# Altium PCB NES Emulator PCB.PcbDoc (part 2 of 3)
Units mm, origin at the board's own origin, x right, y up, seen from the top; angles counter-clockwise.
Board outline 76 x 100 mm, 4 copper layers (Top Layer, GND Plane, Power Layer, Bottom Layer), stack 0.603 mm thick; 101 components, 158 nets, 536 pads, 230 vias.
Unrouted connection lines stored in the file: 6.
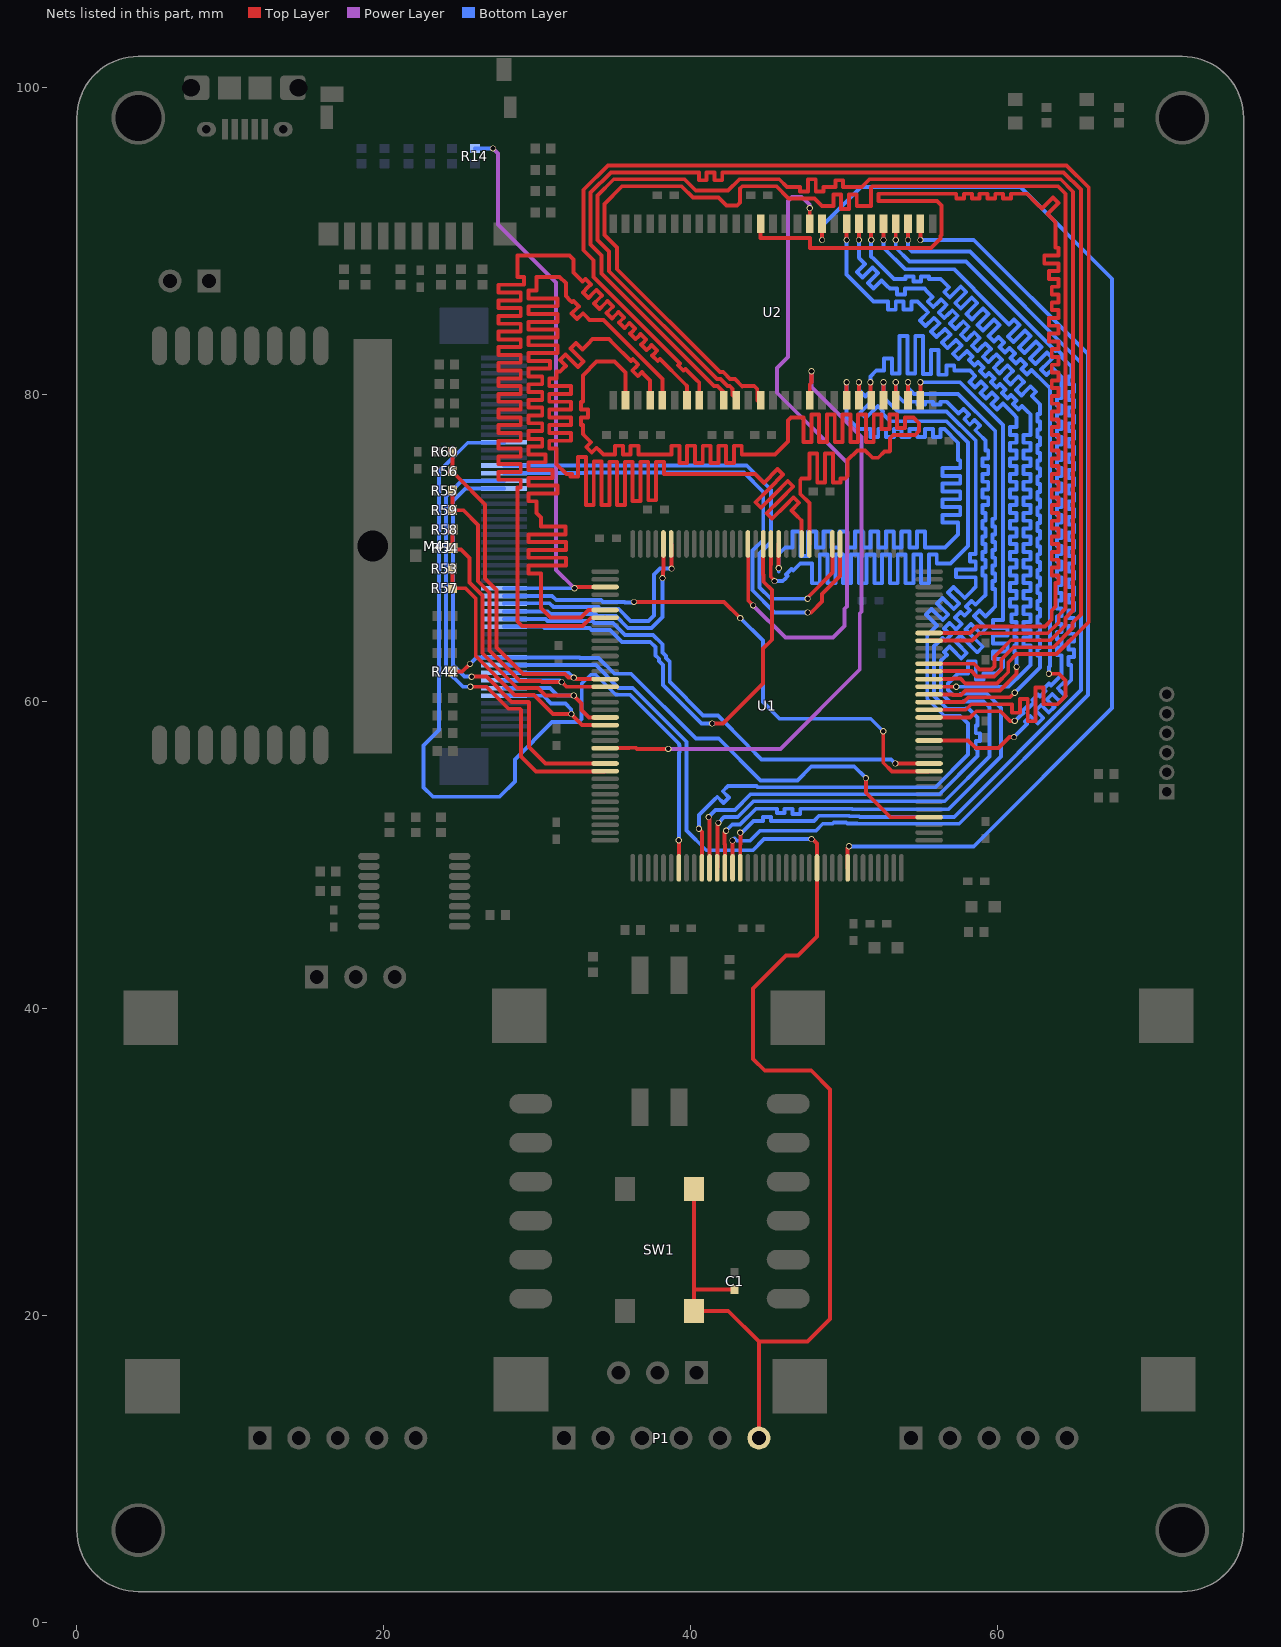
[diagram p4: the nets of this part, all layers, seen from the top]

## Via types
v1: diameter 0.4, hole 0.3, Top Layer to Bottom Layer, 225 vias
v2: diameter 0.65, hole 0.5, Top Layer to Bottom Layer, 2 vias
v3: diameter 0.6, hole 0.4, Top Layer to Bottom Layer, 2 vias
v4: diameter 0.45, hole 0.3, Top Layer to Bottom Layer, 1 vias

## Nets (pads, with @x,y where several pads share a name; then routed paths per layer and width w, separated by ;. In a path a pad name is that pad's centre, name@x,y a point inside that pad or via, vN(x,y) a via of type N, cw(c..) or ccw(c..) an arc to the next point about the centre after c; other vN are vias at no path point) (continued)
LCD_IM0: M41.6 R53.2 R57.1 U1.129 | length 22.2
  Top Layer w0.254: R53.2@24.476,68.627 R57.1@24.476,67.357 25.307,67.357 25.98,66.685 25.98,62.931 28.499,60.412 29.776,60.412 31.026,59.162 v1(32.214,59.162) 32.214,59.127 32.901,58.44 U1.129@34.41,58.44
  Bottom Layer w0.254: M41.6@27.818,60.354 30.386,60.354 30.886,59.854 31.816,59.854 32.204,59.466 32.204,59.171 v1(32.214,59.162)
LCD_IM1: M41.7 R54.2 R58.1 U1.128 | length 23.9
  Top Layer w0.254: R58.1@24.476,71.167 24.476,69.897 24.483,69.891 25.008,69.891 25.582,69.318 25.582,67.725 26.434,66.873 26.434,63.119 28.687,60.866 30.028,60.866 30.521,60.372 v1(32.361,60.372) 32.876,59.857 32.876,59.429 33.365,58.94 U1.128@34.41,58.94
  Bottom Layer w0.254: M41.7@27.818,60.854 30.816,60.854 31.298,60.372 v1(32.361,60.372)
LCD_IM2: M41.8 R55.2 R59.1 U1.124 | length 24.1
  Top Layer w0.254: R55.2@24.476,73.707 R59.1@24.476,72.437 25.18,72.437 26.138,71.479 26.138,67.811 26.888,67.061 26.888,63.307 28.875,61.32 30.216,61.32 30.289,61.247 v1(31.577,61.247) 31.884,60.94 U1.124@34.41,60.94
  Bottom Layer w0.254: M41.8@27.818,61.354 31.43,61.354 31.537,61.247 v1(31.577,61.247)
LCD_IM3: M41.9 R56.2 R60.1 U1.123 | length 26.4
  Top Layer w0.254: R60.1@24.476,76.247 24.476,74.952 24.779,74.65 24.779,74.628 26.592,72.815 26.592,67.999 27.342,67.249 27.342,63.496 29.063,61.774 31.795,61.774 32.034,61.535 v1(32.361,61.535) ; v1@32.496,61.44 U1.123@34.41,61.44
  Bottom Layer w0.254: M41.9@27.818,61.854 32.042,61.854 v1(32.361,61.535)
LCD_R2: M41.20 R14.1 U1.111 | length 38.7
  Top Layer w0.254: v1(32.417,67.357) 32.499,67.44 U1.111@34.41,67.44
  Power Layer w0.254: v1(27.107,96.004) 27.442,95.669 27.442,91.059 31.218,87.283 31.218,68.556 v1(32.417,67.357)
  Bottom Layer w0.254: R14.1@25.918,96.004 v1(27.107,96.004) ; M41.20@27.818,67.354 27.821,67.357 v1(32.417,67.357)
LCD_R3: M41.19 U1.46 | length 36
  Top Layer w0.254: v1(36.29,66.465) 42.157,66.465 v1(43.212,65.41) ; v1(52.524,58.039) 52.524,55.986 53.098,55.413 53.534,55.413 53.538,55.417 55.487,55.417 U1.46@55.51,55.44
  Bottom Layer w0.254: M41.19@27.818,66.854 30.947,66.854 31.223,66.578 34.157,66.578 34.282,66.453 35.673,66.453 35.686,66.44 36.299,66.44 36.29,66.449 v1(36.29,66.465) ; v1(43.212,65.41) 44.68,63.942 44.68,59.947 45.772,58.854 51.709,58.854 v1(52.524,58.039)
LCD_R4: M41.18 U1.103 | length 16
  Top Layer w0.254: U1.103@38.71,70.24 38.733,70.217 38.733,68.637 v1(38.737,68.633)
  Bottom Layer w0.254: M41.18@27.818,66.354 27.841,66.377 30.782,66.377 31.035,66.124 33.969,66.124 34.094,65.999 35.297,65.999 36.072,65.225 37.244,65.225 37.587,65.568 37.587,68.246 37.974,68.633 v1(38.737,68.633)
LCD_R5: M41.17 U1.104 | length 15.8
  Top Layer w0.254: v1@38.21,68.028 38.183,68.055 38.183,68.492 38.21,68.519 U1.104@38.21,70.24
  Bottom Layer w0.254: M41.17@27.818,65.854 30.663,65.854 30.847,65.67 33.781,65.67 33.906,65.546 35.109,65.546 35.884,64.771 37.432,64.771 37.919,65.257 37.925,65.257 38.145,65.477 v1(38.145,68.014)
LCD_R6: M41.16 U1.47 | length 32.8
  Top Layer w0.254: v1(53.316,55.94) U1.47@55.51,55.94
  Bottom Layer w0.254: M41.16@27.818,65.354 30.521,65.354 30.659,65.216 33.593,65.216 33.718,65.092 34.921,65.092 35.696,64.317 37.534,64.317 38.145,63.707 38.145,63.172 38.368,62.949 38.368,62.805 38.622,62.551 38.622,61.247 40.795,59.074 41.75,59.074 43.699,57.125 43.699,57.094 44.586,56.207 53.049,56.207 v1(53.316,55.94)
LCD_R7: M41.15 U1.91 | length 31.3
  Top Layer w0.254: v1(41.378,58.547) 42.101,58.547 44.706,61.152 44.706,63.423 45.285,64.002 45.285,67.23 44.735,67.78 44.735,68.231 44.706,68.26 44.706,70.236 U1.91@44.71,70.24
  Bottom Layer w0.254: M41.15@27.818,64.854 30.379,64.854 30.471,64.762 33.405,64.762 33.53,64.638 34.733,64.638 35.508,63.863 37.346,63.863 37.691,63.518 37.691,62.984 37.914,62.76 37.914,62.617 38.168,62.363 38.168,61.059 40.68,58.547 v1(41.378,58.547)
LCD_RDX: M41.35 U1.81 | length 33.8
  Top Layer w0.254: v1(47.601,65.779) 47.836,65.779 48.541,66.484 48.541,66.98 49.71,68.149 U1.81@49.71,70.24
  Bottom Layer w0.254: M41.35@27.818,74.854 33.202,74.854 33.242,74.894 43.452,74.894 44.711,73.636 44.711,70.511 44.007,69.808 44.007,67.224 45.452,65.779 v1(47.601,65.779)
LCD_RST: C1.2 M41.10 P1.6 SW1.1 SW1.2 U1.25 | length 93.4
  Top Layer w0.254: SW1.1@40.199,28.232 40.199,21.717 ; C1.2@42.837,21.675 40.241,21.675 40.199,21.717 ; P1.6@44.426,12 44.426,18.288 ; v1(47.855,51.012) 47.923,51.012 48.21,50.725 U1.25@48.21,49.14 48.21,44.678 46.966,43.434 46.204,43.434 44.045,41.275 44.045,36.703 44.807,35.941 47.837,35.941 49.066,34.712 49.066,19.753 47.601,18.288 44.426,18.288 ; 40.199,21.717 SW1.2@40.199,20.282 42.432,20.282 44.426,18.288
  Bottom Layer w0.254: M41.10@27.818,62.354 33.806,62.354 35.29,60.87 36.207,60.87 39.718,57.359 39.718,51.571 40.997,50.292 44.045,50.292 44.765,51.012 v1(47.855,51.012)
LCD_SDI: M41.34 U1.135 | length 30.4
  Top Layer w0.254: v1(25.63,60.94) 26.687,60.94 28.123,59.504 28.864,59.504 28.932,59.436 28.932,56.388 29.903,55.417 34.387,55.417 U1.135@34.41,55.44
  Bottom Layer w0.254: v1(25.63,60.94) 25.139,60.94 24.043,62.037 24.043,73.343 25.054,74.354 M41.34@27.818,74.354
LCD_SDO: M41.33 U1.134 | length 28.6
  Top Layer w0.254: v1(25.715,61.595) 26.674,61.595 28.311,59.958 29.408,59.958 29.44,59.926 29.44,57.012 30.512,55.94 U1.134@34.41,55.94
  Bottom Layer w0.254: v1(25.715,61.595) 25.249,61.595 24.497,62.347 24.497,73.035 25.316,73.854 M41.33@27.818,73.854
LCD_TE: M41.39 U1.7 | length 58.4
  Top Layer w0.254: U1.7@39.21,49.14 v1(39.21,50.945)
  Bottom Layer w0.254: M41.39@27.818,76.854 27.795,76.831 25.464,76.831 23.589,74.956 23.589,58.133 22.576,57.12 22.576,54.386 23.188,53.774 27.534,53.774 28.529,54.769 28.529,56.204 30.96,58.635 32.681,58.635 32.869,58.823 32.869,60.116 32.888,60.135 32.888,61.139 33.471,61.722 33.796,61.722 35.102,60.416 36.019,60.416 39.21,57.225 39.21,57.168 39.264,57.114 39.264,56.678 39.21,56.624 v1(39.21,50.945)
LCD_VSYNC: M41.11 R44.2 U1.40 | length 37
  Top Layer w0.254: R44.2@24.479,61.924 25.106,61.924 v1(25.611,62.429) ; v1(51.399,54.991) 51.399,54.035 52.994,52.44 U1.40@55.51,52.44
  Bottom Layer w0.254: v1(25.611,62.429) 26.036,62.854 M41.11@27.818,62.854 32.745,62.854 32.777,62.822 33.981,62.822 35.013,61.789 36.104,61.789 40.336,57.557 41.808,57.557 44.521,54.845 46.928,54.845 47.836,55.753 50.637,55.753 v1(51.399,54.991)
LCD_WRX: M41.36 U1.82 | length 32.4
  Top Layer w0.254: v1(47.601,66.675) 47.601,66.74 49.233,68.372 49.233,70.217 U1.82@49.21,70.24
  Bottom Layer w0.254: M41.36@27.818,75.354 43.634,75.354 45.219,73.769 45.219,70.377 44.461,69.619 44.461,67.412 45.198,66.675 v1(47.601,66.675)
MEM_A0: U1.10 U2.23 | length 66.2
  Top Layer w0.254: v1(40.515,51.689) 40.71,51.494 U1.10@40.71,49.14 ; U2.23@52.541,79.594 v1(52.541,80.772)
  Bottom Layer w0.254: v1(40.515,51.689) 40.515,52.578 41.531,53.594 41.71,53.774 42.125,53.359 42.484,53.718 42.069,54.133 42.404,54.467 42.658,54.467 42.801,54.467 44.257,54.467 44.333,54.391 55.917,54.391 58.041,56.515 58.041,58.547 57.537,59.051 56.496,59.051 55.39,60.158 55.39,64.278 55.501,64.389 55.68,64.569 56.039,64.928 55.314,65.653 55.673,66.013 56.399,65.287 56.758,65.646 56.032,66.372 56.392,66.731 57.117,66.005 57.476,66.365 56.751,67.09 57.11,67.449 57.835,66.724 58.195,67.083 58.546,67.434 58.549,67.437 58.549,67.818 58.549,68.072 57.269,68.072 57.269,68.58 58.549,68.58 58.549,69.088 58.175,69.088 58.175,69.596 58.549,69.596 58.549,70.104 58.549,70.612 58.549,70.739 58.549,76.976 56.658,78.867 53.469,78.867 52.541,79.795 v1(52.541,80.772)
MEM_A1: U1.11 U2.24 | length 66.2
  Top Layer w0.254: v1(41.15,52.451) 41.21,52.391 U1.11@41.21,49.14 ; U2.24@53.341,79.594 v1(53.341,80.772)
  Bottom Layer w0.254: v1(41.15,52.451) 41.604,52.905 42.859,52.905 43.891,53.937 56.177,53.937 58.676,56.436 58.676,56.642 58.676,56.896 58.549,56.896 58.549,57.404 58.676,57.404 58.817,57.404 58.817,57.912 58.676,57.912 58.549,57.912 58.549,58.42 58.676,58.42 58.676,58.928 58.074,59.53 57.898,59.53 57.873,59.505 56.684,59.505 55.844,60.346 55.844,63.589 56.023,63.769 56.382,64.128 56.569,63.941 56.929,64.3 56.742,64.487 56.491,64.738 56.85,65.097 57.101,64.846 57.271,64.676 57.63,65.036 57.46,65.205 57.21,65.456 57.569,65.815 57.819,65.565 58.178,65.924 57.928,66.174 58.287,66.534 58.538,66.283 58.897,66.642 59.184,66.929 59.184,67.183 59.184,67.691 59.184,68.199 59.003,68.199 59.003,68.707 59.184,68.707 59.184,69.215 59.003,69.215 59.003,69.723 59.184,69.723 59.184,70.231 59.003,70.231 59.003,70.739 59.184,70.739 59.184,71.247 59.003,71.247 59.003,71.755 59.184,71.755 59.184,72.263 59.003,72.263 59.003,72.771 59.184,72.771 59.365,72.771 59.365,73.279 59.184,73.279 59.003,73.279 59.003,73.787 59.184,73.787 59.365,73.787 59.365,74.295 59.184,74.295 59.003,74.295 59.003,74.803 59.184,74.803 59.365,74.803 59.365,75.311 59.184,75.311 59.003,75.311 59.003,75.819 59.184,75.819 59.365,75.819 59.365,76.327 59.184,76.327 59.184,76.835 59.184,76.983 59.057,77.11 58.877,77.29 58.518,77.649 58.821,77.952 58.462,78.312 58.159,78.008 57.799,78.367 58.103,78.671 57.744,79.03 57.44,78.727 57.081,79.086 56.722,79.445 56.665,79.502 56.517,79.502 56.263,79.502 56.263,79.321 55.755,79.321 55.755,79.502 55.247,79.502 55.247,79.321 54.739,79.321 54.739,79.502 54.231,79.502 53.85,79.502 ; v1(53.341,80.772) 53.341,80.01 53.849,79.502
MEM_A2: U1.12 U2.25 | length 66
  Top Layer w0.254: U1.12@41.71,49.14 41.733,49.163 41.733,50.517 41.729,50.521 41.729,52.014 v1(41.785,52.07) ; U2.25@54.141,79.594 v1(54.141,80.772)
  Bottom Layer w0.254: v1(41.785,52.07) 42.166,52.451 43.047,52.451 44.079,53.483 56.533,53.483 59.438,56.388 59.438,59.603 59.057,59.984 57.71,59.984 57.685,59.959 56.872,59.959 56.298,60.534 56.298,62.643 56.487,62.832 56.666,63.011 56.474,63.204 56.833,63.563 57.026,63.371 57.605,62.791 57.964,63.15 57.385,63.73 57.193,63.922 57.552,64.281 57.744,64.089 58.649,63.184 59.008,63.543 58.103,64.448 57.894,64.657 58.253,65.017 58.462,64.807 58.875,64.395 59.234,64.754 58.822,65.167 58.442,65.546 58.802,65.905 59.181,65.526 59.54,65.885 59.819,66.164 59.819,66.167 59.819,67.056 59.819,67.31 59.638,67.31 59.638,67.818 59.819,67.818 59.819,68.326 59.638,68.326 59.638,68.834 59.819,68.834 59.819,69.342 59.638,69.342 59.638,69.85 59.819,69.85 59.819,70.358 59.638,70.358 59.638,70.866 59.819,70.866 59.819,71.374 59.638,71.374 59.638,71.882 59.819,71.882 59.819,73.914 59.819,77.597 57.406,80.01 54.522,80.01 54.141,80.391 v1(54.141,80.772)
MEM_A3: U1.13 U2.26 | length 66.2
  Top Layer w0.254: U1.13@42.21,49.14 42.21,50.682 42.183,50.709 42.183,51.452 v1(42.293,51.562) ; U2.26@54.941,79.594 v1(54.941,80.772)
  Bottom Layer w0.254: v1(42.293,51.562) 42.693,51.962 43.2,51.962 44.232,52.994 44.833,52.994 45.087,52.994 45.595,52.994 45.595,52.706 46.103,52.706 46.103,52.994 46.611,52.994 46.611,52.651 47.119,52.651 47.119,52.994 47.627,52.994 48.008,52.994 50.492,52.994 50.527,52.959 56.771,52.959 60.2,56.388 60.2,59.563 59.277,60.486 57.57,60.486 57.497,60.413 57.06,60.413 56.752,60.722 56.752,61.158 57.406,61.812 57.787,61.812 58.041,61.812 58.041,62.584 58.549,62.584 58.549,61.812 58.549,61.394 59.057,61.394 59.057,61.812 59.565,61.812 59.819,61.812 59.909,61.812 60.327,62.23 60.327,62.484 60.327,62.738 59.688,62.738 59.688,63.246 60.327,63.246 60.629,63.246 60.629,63.754 60.327,63.754 59.688,63.754 59.688,64.262 60.327,64.262 60.629,64.262 60.629,64.77 60.327,64.77 59.688,64.77 59.688,65.278 60.327,65.278 60.327,66.294 60.327,77.978 57.533,80.772 v1(54.941,80.772)
MEM_A4: U1.14 U2.29 | length 66.3
  Top Layer w0.254: U1.14@42.687,49.163 U1.14@42.71,49.14 v1(42.71,50.927) ; v1(54.941,90.043) U2.29@54.941,91.094
  Bottom Layer w0.254: v1(42.71,50.927) 42.842,51.059 42.993,50.908 43.855,50.908 44.509,51.562 48.135,51.562 48.586,52.013 49.23,52.013 49.303,52.086 50.116,52.086 50.178,52.024 50.804,52.024 50.815,52.013 57.476,52.013 65.861,60.398 65.861,82.604 58.422,90.043 v1(54.941,90.043)
MEM_A5: U1.15 U2.30 | length 66.2
  Top Layer w0.254: U1.15@43.21,49.14 43.212,49.142 43.212,50.684 43.237,50.709 43.237,51.41 v1(43.212,51.435) ; v1(54.141,90.043) U2.30@54.141,91.094
  Bottom Layer w0.254: v1(43.212,51.435) 43.315,51.435 44.077,52.197 44.452,52.197 44.706,52.197 44.706,52.459 45.214,52.459 45.214,52.197 46.357,52.197 48.008,52.197 48.351,52.54 50.304,52.54 50.339,52.505 50.965,52.505 51.003,52.467 57.148,52.467 65.407,60.726 65.407,82.042 58.168,89.281 54.395,89.281 54.141,89.535 v1(54.141,90.043)
MEM_A6: U1.50 U2.31 | length 66.2
  Top Layer w0.254: v1(53.341,90.043) U2.31@53.341,91.094 ; U1.50@55.51,57.44 58.049,57.44 58.549,56.94 60.032,56.94 60.75,57.658 v1(61.041,57.658)
  Bottom Layer w0.254: v1(53.341,90.043) 53.341,89.536 54.231,88.646 57.914,88.646 62.422,84.138 63.747,82.813 63.836,82.903 64.196,82.544 64.106,82.454 64.465,82.095 64.645,81.915 64.772,81.788 64.772,81.407 64.772,81.153 64.591,81.153 64.591,80.645 64.772,80.645 64.953,80.645 64.953,80.137 64.772,80.137 64.591,80.137 64.591,79.629 64.772,79.629 64.953,79.629 64.953,79.121 64.772,79.121 64.591,79.121 64.591,78.613 64.772,78.613 64.953,78.613 64.953,78.105 64.772,78.105 64.591,78.105 64.591,77.597 64.772,77.597 64.953,77.597 64.953,77.089 64.772,77.089 64.591,77.089 64.591,76.581 64.772,76.581 64.953,76.581 64.953,76.073 64.772,76.073 64.591,76.073 64.591,75.565 64.772,75.565 64.953,75.565 64.953,75.057 64.772,75.057 64.591,75.057 64.591,74.549 64.772,74.549 64.953,74.549 64.953,74.041 64.772,74.041 64.591,74.041 64.591,73.533 64.772,73.533 64.953,73.533 64.953,73.025 64.772,73.025 64.591,73.025 64.591,72.517 64.772,72.517 64.953,72.517 64.953,72.009 64.772,72.009 64.591,72.009 64.591,71.501 64.772,71.501 64.953,71.501 64.953,70.993 64.772,70.993 64.591,70.993 64.591,70.485 64.772,70.485 64.953,70.485 64.953,69.977 64.772,69.977 64.591,69.977 64.591,69.469 64.772,69.469 64.953,69.469 64.953,68.961 64.772,68.961 64.591,68.961 64.591,68.453 64.772,68.453 64.953,68.453 64.953,67.945 64.772,67.945 64.591,67.945 64.591,67.437 64.772,67.437 64.953,67.437 64.953,66.929 64.772,66.929 64.591,66.929 64.591,66.421 64.772,66.421 64.953,66.421 64.953,65.913 64.772,65.913 64.591,65.913 64.591,65.405 64.772,65.405 64.953,65.405 64.953,64.897 64.772,64.897 64.591,64.897 64.591,64.389 64.772,64.389 64.953,64.389 64.953,63.881 64.772,63.881 64.591,63.881 64.591,63.373 64.772,63.373 64.953,63.373 64.953,62.865 64.772,62.865 64.591,62.865 64.591,62.357 64.772,62.357 64.772,62.103 64.772,61.468 64.772,61.389 64.418,61.035 64.255,61.198 63.895,60.839 64.058,60.676 64.386,60.348 64.027,59.989 63.699,60.317 63.536,60.48 63.177,60.12 63.34,59.957 63.668,59.629 63.309,59.27 62.981,59.598 62.818,59.761 62.459,59.402 62.622,59.239 62.95,58.911 62.59,58.552 62.262,58.88 62.099,59.043 61.74,58.684 61.903,58.521 61.724,58.341 v1(61.041,57.658)
MEM_A7: U1.53 U2.32 | length 66.2
  Top Layer w0.254: v1(52.541,90.043) U2.32@52.541,91.094 ; U1.53@55.51,58.94 58.18,58.94 58.583,59.343 60.166,59.343 60.793,58.716 v1(61.089,58.716)
  Bottom Layer w0.254: v1(52.541,90.043) 52.541,89.535 53.938,88.138 57.132,88.138 59.745,85.525 60.724,84.545 61.047,84.868 61.406,84.509 61.083,84.186 60.654,83.757 61.013,83.398 61.443,83.827 61.765,84.15 62.124,83.79 61.802,83.468 61.372,83.038 61.731,82.679 62.161,83.109 62.483,83.431 62.843,83.072 62.52,82.749 62.091,82.32 62.45,81.961 62.879,82.39 63.202,82.713 63.561,82.354 63.239,82.031 62.809,81.602 63.168,81.242 63.598,81.672 63.957,81.313 64.137,81.133 64.137,80.772 64.137,80.264 64.137,79.756 63.831,79.756 63.831,79.248 64.137,79.248 64.137,78.74 63.831,78.74 63.831,78.232 64.137,78.232 64.137,77.724 63.831,77.724 63.831,77.216 64.137,77.216 64.137,76.708 63.831,76.708 63.831,76.2 64.137,76.2 64.137,75.692 63.831,75.692 63.831,75.184 64.137,75.184 64.137,74.676 63.831,74.676 63.831,74.168 64.137,74.168 64.137,73.66 63.831,73.66 63.831,73.152 64.137,73.152 64.137,72.644 63.831,72.644 63.831,72.136 64.137,72.136 64.137,71.628 63.831,71.628 63.831,71.12 64.137,71.12 64.137,70.612 63.831,70.612 63.831,70.104 64.137,70.104 64.137,69.596 63.831,69.596 63.831,69.088 64.137,69.088 64.137,68.58 63.831,68.58 63.831,68.072 64.137,68.072 64.137,67.564 63.831,67.564 63.831,67.056 64.137,67.056 64.137,66.548 63.831,66.548 63.831,66.04 64.137,66.04 64.137,65.532 63.831,65.532 63.831,65.024 64.137,65.024 64.137,64.516 63.831,64.516 63.831,64.008 64.137,64.008 64.137,63.5 63.831,63.5 63.831,62.992 64.137,62.992 64.137,62.484 64.137,61.976 64.137,61.722 63.804,61.39 63.445,61.031 63.323,61.153 62.964,60.793 63.086,60.671 62.727,60.312 62.605,60.434 62.246,60.075 62.368,59.953 62.008,59.594 61.919,59.684 61.559,59.324 61.649,59.235 61.47,59.055 61.179,58.764 61.163,58.764 61.115,58.716 v1(61.089,58.716)
MEM_A8: U1.54 U2.33 | length 66.2
  Top Layer w0.254: v1(51.741,90.043) U2.33@51.741,91.094 ; U1.54@55.51,59.44 57.9,59.44 58.259,59.799 60.162,59.799 60.416,59.799 60.924,59.799 60.924,59.243 61.432,59.243 61.432,59.799 61.432,60.152 61.94,60.152 61.94,59.799 61.94,58.695 62.448,58.695 62.448,59.799 62.448,60.903 62.956,60.903 62.956,59.799 63.464,59.799 63.884,59.799 64.41,60.325 64.41,61.351 63.972,61.789 v1(63.315,61.789)
  Bottom Layer w0.254: v1(51.741,90.043) 51.741,88.977 51.92,88.797 52.279,88.438 52.639,88.079 52.998,87.72 53.215,87.503 53.469,87.503 53.977,87.503 53.977,87.659 54.485,87.659 54.485,87.503 54.485,87.347 54.993,87.347 54.993,87.503 54.993,87.659 55.501,87.659 55.501,87.503 56.009,87.503 56.263,87.503 56.442,87.323 56.801,86.964 56.499,86.662 56.858,86.303 57.161,86.605 57.574,87.018 57.933,86.659 57.52,86.246 57.217,85.943 57.577,85.584 57.879,85.887 58.292,86.3 58.651,85.94 58.238,85.527 57.936,85.225 58.295,84.866 58.597,85.168 59.011,85.581 59.37,85.222 58.957,84.809 58.654,84.506 59.013,84.147 59.316,84.45 59.729,84.863 60.088,84.504 59.675,84.091 59.373,83.788 59.732,83.429 60.034,83.731 60.394,83.372 60.091,83.07 60.45,82.71 60.753,83.013 61.112,82.654 60.81,82.351 61.169,81.992 61.471,82.294 61.83,81.935 61.528,81.633 61.887,81.274 62.19,81.576 63.121,80.645 63.375,80.391 63.375,62.299 63.315,62.239 v1(63.315,61.789)
MEM_A9: U1.55 U2.34 | length 66.2
  Top Layer w0.254: v1(50.941,90.043) U2.34@50.941,91.094 ; U1.55@55.51,59.94 57.758,59.94 58.071,60.253 60.79,60.253 v1(61.089,60.552)
  Bottom Layer w0.254: v1(50.941,90.043) 50.941,88.888 50.985,88.844 51.344,88.484 50.806,87.946 51.165,87.587 51.703,88.125 51.819,88.241 52.178,87.882 52.063,87.766 51.525,87.228 51.884,86.869 52.422,87.407 52.781,87.048 52.961,86.868 53.427,86.868 53.427,86.494 53.935,86.494 53.935,86.868 54.443,86.868 54.951,86.868 55.205,86.868 55.376,86.697 55.735,86.338 55.424,86.026 55.783,85.667 56.094,85.978 56.299,86.184 56.659,85.824 56.453,85.619 56.142,85.308 56.501,84.949 56.813,85.26 57.018,85.465 57.377,85.106 57.172,84.901 56.861,84.59 57.22,84.23 57.531,84.542 57.736,84.747 58.095,84.387 57.89,84.182 57.579,83.871 57.938,83.512 58.249,83.823 58.455,84.028 58.814,83.669 58.609,83.464 58.298,83.153 58.657,82.793 58.968,83.105 59.173,83.31 59.532,82.951 59.327,82.745 59.016,82.434 59.375,82.075 59.686,82.386 59.891,82.591 60.251,82.232 60.046,82.027 59.734,81.716 60.094,81.357 60.405,81.668 60.61,81.873 60.969,81.514 60.764,81.309 60.453,80.997 60.812,80.638 61.123,80.949 61.328,81.155 61.688,80.795 61.482,80.59 61.171,80.279 61.53,79.92 61.842,80.231 62.126,80.516 62.486,80.156 62.201,79.872 62.56,79.513 62.74,79.333 62.74,79.221 62.74,78.713 62.57,78.713 62.57,78.205 62.74,78.205 62.74,77.697 62.57,77.697 62.57,77.189 62.74,77.189 62.74,76.681 62.57,76.681 62.57,76.173 62.74,76.173 62.74,75.665 62.57,75.665 62.57,75.157 62.74,75.157 62.74,74.649 62.57,74.649 62.57,74.141 62.74,74.141 62.74,73.633 62.57,73.633 62.57,73.125 62.74,73.125 62.74,72.617 62.57,72.617 62.57,72.109 62.74,72.109 62.74,71.601 62.57,71.601 62.57,71.093 62.74,71.093 62.74,70.585 62.57,70.585 62.57,70.077 62.74,70.077 62.74,69.569 62.57,69.569 62.57,69.061 62.74,69.061 62.74,68.553 62.57,68.553 62.57,68.045 62.74,68.045 62.74,67.537 62.57,67.537 62.57,67.029 62.74,67.029 62.74,66.521 62.57,66.521 62.57,66.013 62.74,66.013 62.74,65.505 62.57,65.505 62.57,64.997 62.74,64.997 62.74,64.489 62.57,64.489 62.57,63.981 62.74,63.981 62.74,63.473 62.57,63.473 62.57,62.965 62.74,62.965 62.74,62.457 62.74,62.203 62.6,62.063 62.241,61.704 61.881,61.345 61.522,60.986 61.343,60.806 v1(61.089,60.552)
MEM_A10: U1.56 U2.22 | length 66.2
  Top Layer w0.254: v1(51.691,80.772) 51.691,79.644 U2.22@51.741,79.594 ; U1.56@55.51,60.44 57.033,60.44 57.06,60.413 57.589,60.413 57.883,60.707 60.133,60.707 61.216,61.789 v1(61.216,62.23)
  Bottom Layer w0.254: v1(51.691,80.772) 51.691,81.153 52.072,81.534 52.326,81.534 52.58,81.534 52.58,82.333 53.088,82.333 53.088,81.534 53.088,81.334 53.596,81.334 53.596,81.534 53.596,83.795 54.104,83.795 54.104,81.534 54.104,81.334 54.612,81.334 54.612,81.534 54.612,83.795 55.12,83.795 55.12,81.534 55.12,81.303 55.628,81.303 55.628,81.534 55.628,82.888 56.136,82.888 56.136,81.534 56.136,81.261 56.644,81.261 56.644,81.534 56.644,81.877 57.152,81.877 57.152,81.534 57.406,81.534 57.66,81.534 57.914,81.534 58.168,81.534 58.522,81.18 58.144,80.803 58.503,80.443 58.881,80.821 59.24,80.462 58.862,80.084 59.222,79.725 59.599,80.102 59.958,79.743 59.581,79.366 59.94,79.007 60.318,79.384 60.677,79.025 61.036,78.666 61.216,78.486 61.216,78.359 61.216,77.851 60.781,77.851 60.781,77.343 61.216,77.343 61.216,76.835 60.781,76.835 60.781,76.327 61.216,76.327 61.216,75.819 60.781,75.819 60.781,75.311 61.216,75.311 61.216,74.803 60.781,74.803 60.781,74.295 61.216,74.295 61.216,73.787 60.781,73.787 60.781,73.279 61.216,73.279 61.216,72.771 60.781,72.771 60.781,72.263 61.216,72.263 61.216,71.755 60.781,71.755 60.781,71.247 61.216,71.247 61.216,70.739 60.781,70.739 60.781,70.231 61.216,70.231 61.216,69.723 60.781,69.723 60.781,69.215 61.216,69.215 61.216,68.707 60.781,68.707 60.781,68.199 61.216,68.199 61.216,67.691 60.781,67.691 60.781,67.183 61.216,67.183 61.216,66.675 60.781,66.675 60.781,66.167 61.216,66.167 61.216,65.659 60.876,65.659 60.876,65.151 61.216,65.151 61.216,64.643 61.083,64.643 61.083,64.135 61.216,64.135 61.216,63.627 61.083,63.627 61.083,63.119 61.216,63.119 61.216,62.865 v1(61.216,62.23)
MEM_A11: U1.57 U2.35 | length 66.2
  Top Layer w0.254: v1(50.141,90.043) U2.35@50.141,91.094 ; U1.57@55.51,60.94 v1(57.279,60.94)
  Bottom Layer w0.254: v1(50.141,90.043) 50.141,87.783 51.895,86.029 52.326,86.029 52.834,86.029 52.834,85.495 53.342,85.495 53.342,86.029 53.85,86.029 53.85,85.514 54.358,85.514 54.358,86.029 54.612,86.029 54.764,86.029 55.322,85.471 55.459,85.333 54.913,84.788 55.273,84.428 55.818,84.974 56.178,84.615 55.632,84.069 55.991,83.71 56.537,84.256 56.896,83.897 56.35,83.351 56.709,82.991 57.255,83.537 57.614,83.178 57.069,82.632 57.428,82.273 57.974,82.819 58.333,82.46 58.108,82.235 58.467,81.875 58.692,82.1 59.051,81.741 58.827,81.517 59.186,81.158 59.411,81.382 59.77,81.023 59.545,80.798 59.904,80.439 60.129,80.664 60.488,80.304 60.264,80.08 60.623,79.721 60.847,79.945 61.207,79.586 60.982,79.362 61.341,79.002 61.566,79.227 61.925,78.868 62.105,78.688 62.105,78.359 62.105,77.851 62.105,77.343 61.67,77.343 61.67,76.835 62.105,76.835 62.105,76.327 61.67,76.327 61.67,75.819 62.105,75.819 62.105,75.311 61.67,75.311 61.67,74.803 62.105,74.803 62.105,74.295 61.67,74.295 61.67,73.787 62.105,73.787 62.105,73.279 61.67,73.279 61.67,72.771 62.105,72.771 62.105,72.263 61.67,72.263 61.67,71.755 62.105,71.755 62.105,71.247 61.67,71.247 61.67,70.739 62.105,70.739 62.105,70.231 61.67,70.231 61.67,69.723 62.105,69.723 62.105,69.215 61.67,69.215 61.67,68.707 62.105,68.707 62.105,68.199 61.67,68.199 61.67,67.691 62.105,67.691 62.105,67.183 61.67,67.183 61.67,66.675 62.105,66.675 62.105,66.167 61.67,66.167 61.67,65.659 62.105,65.659 62.105,65.151 61.67,65.151 61.67,64.643 62.105,64.643 62.105,64.135 61.67,64.135 61.67,63.627 62.105,63.627 62.105,63.119 62.105,62.611 62.105,62.357 61.987,62.239 61.627,61.88 61.268,61.521 61.089,61.341 60.688,60.94 58.041,60.94 v1(57.279,60.94)
MEM_BA0: U1.89 U2.20 | length 67.3
  Top Layer w0.254: U1.89@45.71,70.24 45.71,68.683 v1(45.722,68.671) ; U2.20@50.141,79.594 v1(50.141,80.772)
  Bottom Layer w0.254: 45.716,68.453 45.716,69.59 ; v1(45.722,68.671) 45.722,69.584 45.716,69.59 ; v1(50.141,80.772) 50.141,78.512 50.929,77.724 51.31,77.724 51.691,77.724 51.691,77.206 52.199,77.206 52.199,77.724 52.707,77.724 52.707,77.206 53.215,77.206 53.215,77.724 53.723,77.724 53.723,77.206 54.231,77.206 54.231,77.724 54.739,77.724 54.739,77.206 55.247,77.206 55.247,77.724 55.755,77.724 55.755,77.206 56.263,77.206 56.263,77.724 56.517,77.724 57.406,76.835 57.406,75.692 57.543,75.692 57.543,75.184 57.406,75.184 56.378,75.184 56.378,74.676 57.406,74.676 57.543,74.676 57.543,74.168 57.406,74.168 56.378,74.168 56.378,73.66 57.406,73.66 57.543,73.66 57.543,73.152 57.406,73.152 56.378,73.152 56.378,72.644 57.406,72.644 57.543,72.644 57.543,72.136 57.406,72.136 56.378,72.136 56.378,71.628 57.406,71.628 57.406,71.12 57.406,70.866 56.558,70.018 56.261,70.018 55.753,70.018 55.245,70.018 55.245,71.045 54.737,71.045 54.737,70.018 54.229,70.018 54.229,71.045 53.721,71.045 53.721,70.018 53.213,70.018 53.213,71.045 52.705,71.045 52.705,70.018 52.197,70.018 52.197,71.045 51.689,71.045 51.689,70.018 51.181,70.018 51.181,71.045 50.673,71.045 50.673,70.018 50.165,70.018 50.165,71.045 49.657,71.045 49.657,70.018 49.149,70.018 49.149,71.045 48.641,71.045 48.641,70.018 48.133,70.018 48.133,71.045 47.625,71.045 47.625,70.018 47.625,69.459 47.117,69.459 47.117,70.018 47.117,71.045 46.609,71.045 46.609,70.018 46.355,70.018 46.144,70.018 45.716,69.59
MEM_BA1: U1.90 U2.21 | length 66.1
  Top Layer w0.254: U1.90@45.21,70.24 45.21,68.905 45.195,68.89 45.195,68.105 45.442,67.858 v1(45.442,67.818) ; U2.21@50.941,79.594 v1(50.941,80.772)
  Bottom Layer w0.254: v1(45.442,67.818) 45.926,67.818 45.951,67.843 45.976,67.818 46.123,67.966 46.303,68.145 46.201,68.247 46.56,68.606 46.662,68.504 47.021,68.864 47.119,68.961 47.373,68.961 47.881,68.961 47.881,67.681 48.389,67.681 48.389,68.961 48.389,69.564 48.897,69.564 48.897,68.961 48.897,67.681 49.405,67.681 49.405,68.961 49.405,69.564 49.913,69.564 49.913,68.961 49.913,67.681 50.421,67.681 50.421,68.961 50.421,69.564 50.929,69.564 50.929,68.961 50.929,67.681 51.437,67.681 51.437,68.961 51.437,69.564 51.945,69.564 51.945,68.961 51.945,67.681 52.453,67.681 52.453,68.961 52.453,69.564 52.961,69.564 52.961,68.961 52.961,67.681 53.469,67.681 53.469,68.961 53.469,69.564 53.977,69.564 53.977,68.961 53.977,67.681 54.485,67.681 54.485,68.961 54.485,69.564 54.993,69.564 54.993,68.961 54.993,67.681 55.501,67.681 55.501,68.961 55.501,69.564 56.009,69.564 56.009,68.961 56.517,68.961 56.898,68.961 57.077,69.141 57.436,69.5 57.469,69.532 58.041,70.104 58.041,76.842 56.651,78.232 52.973,78.232 52.794,78.412 52.435,78.771 52.524,78.861 52.165,79.22 52.075,79.13 51.387,78.441 51.027,78.8 51.716,79.489 51.87,79.643 51.511,80.003 51.357,79.848 50.998,80.207 50.929,80.277 50.929,80.76 v1(50.941,80.772)
MEM_CAS: U1.132 U2.17 | length 41.5
  Top Layer w0.254: U1.132@34.41,56.94 35.956,56.94 35.983,56.967 36.419,56.967 36.49,56.896 v1(38.518,56.896) ; U2.17@47.741,79.594 47.741,80.646 47.855,80.761 v1(47.855,81.488)
  Power Layer w0.254: v1(38.518,56.896) 45.823,56.896 50.992,62.065 50.992,62.312 50.995,62.315 50.995,64.525 50.992,64.528 50.992,65.717 51.118,65.842 51.118,77.213 47.855,80.476 v1(47.855,81.488)
MEM_CKE0: U1.29 U2.37 | length 74.7
  Top Layer w0.254: v1(48.541,90.043) U2.37@48.541,91.094 ; U1.29@50.21,49.14 50.21,50.424 50.292,50.506 v1(50.292,50.546)
  Bottom Layer w0.254: v1(48.541,90.043) 48.541,90.907 48.516,90.932 51.075,93.491 61.463,93.491 67.439,87.515 67.439,59.563 58.422,50.546 v1(50.292,50.546)
MEM_CLK: U1.93 U2.38 | length 44.2
  Top Layer w0.254: U1.93@43.71,70.24 43.733,70.217 43.733,66.551 v1(44.045,66.239) ; U2.38@47.741,91.094 v1(47.741,92.117)
  Power Layer w0.254: v1(44.045,66.239) 46.149,64.135 49.245,64.135 50.014,64.904 50.014,66.023 50.16,66.169 50.16,75.546 45.614,80.092 45.614,81.706 46.331,82.423 46.331,92.583 46.585,92.837 47.22,92.837 47.713,92.344 47.713,92.145 v1(47.741,92.117)
MEM_D0: U1.85 U2.2 | length 92.2
  Top Layer w0.254: U2.2@35.741,79.594 35.741,81.407 35.033,82.115 33.857,82.115 32.968,81.226 32.968,79.756 32.968,79.502 32.841,79.502 32.841,78.994 32.968,78.994 33.289,78.994 33.289,78.486 32.968,78.486 32.841,78.486 32.841,77.978 32.968,77.978 32.968,77.724 32.968,77.597 32.968,77.397 33.14,77.224 33.499,76.865 33.179,76.545 33.538,76.186 33.859,76.506 34.038,76.326 34.292,76.073 34.546,76.073 35.054,76.073 35.054,76.64 35.562,76.64 35.562,76.073 36.07,76.073 36.07,76.64 36.578,76.64 36.578,76.073 37.086,76.073 37.467,76.073 37.721,76.073 38.229,76.073 38.737,76.073 38.737,76.64 39.245,76.64 39.245,76.073 39.245,75.506 39.753,75.506 39.753,76.073 39.753,76.64 40.261,76.64 40.261,76.073 40.261,75.506 40.769,75.506 40.769,76.073 40.769,76.64 41.277,76.64 41.277,76.073 41.277,75.506 41.785,75.506 41.785,76.073 41.785,76.64 42.293,76.64 42.293,76.073 42.293,75.506 42.801,75.506 42.801,76.073 42.801,76.64 43.309,76.64 43.309,76.073 45.468,76.073 46.312,76.918 46.312,78.279 46.52,78.486 46.827,78.486 47.335,78.486 47.335,76.874 47.843,76.874 47.843,78.486 47.843,78.667 48.351,78.667 48.351,78.486 48.351,76.874 48.859,76.874 48.859,78.486 48.859,78.667 49.367,78.667 49.367,78.486 49.367,76.874 49.875,76.874 49.875,78.486 49.875,78.667 50.383,78.667 50.383,78.486 50.383,76.874 50.891,76.874 50.891,78.486 50.891,78.667 51.399,78.667 51.399,78.486 51.399,76.874 51.907,76.874 51.907,78.486 51.907,78.667 52.415,78.667 52.415,78.486 52.415,77.719 52.923,77.719 52.923,78.486 52.923,78.667 53.431,78.667 53.431,78.486 53.431,77.797 53.939,77.797 53.939,78.486 54.193,78.486 54.485,78.486 54.866,78.105 54.866,77.597 54.612,77.343 53.177,77.343 52.961,77.127 52.961,76.291 52.923,76.253 52.597,76.253 52.202,75.858 51.818,75.858 51.349,76.327 50.837,76.327 50.21,75.7 50.21,74.664 50.054,74.508 49.875,74.508 49.748,74.508 49.748,74.237 49.24,74.237 49.24,74.508 49.24,76.12 48.732,76.12 48.732,74.508 48.732,74.237 48.224,74.237 48.224,74.508 48.224,76.12 47.716,76.12 47.716,74.508 47.462,74.508 47.205,74.508 47.119,74.422 47.119,73.495 47.71,72.904 U1.85@47.71,70.24
MEM_D1: U1.86 U2.4 | length 92.6
  Top Layer w0.254: 32.26,74.79 31.887,74.79 ; U2.4@37.341,79.594 37.341,80.898 36.984,81.255 36.804,81.435 36.538,81.168 36.178,81.527 36.445,81.794 36.568,81.917 36.209,82.277 36.086,82.153 34.927,83.312 34.658,83.581 33.594,83.581 33.29,83.277 32.931,82.918 32.51,83.34 32.15,82.98 32.572,82.559 32.993,82.138 32.634,81.778 32.213,82.2 31.837,82.575 31.478,82.216 31.853,81.841 31.674,81.661 31.486,81.473 31.244,81.473 31.244,81.153 31.244,81.026 30.772,81.026 30.772,80.518 31.244,80.518 32.179,80.518 32.179,80.01 31.244,80.01 30.772,80.01 30.772,79.502 31.244,79.502 32.179,79.502 32.179,78.994 31.244,78.994 30.772,78.994 30.772,78.486 31.244,78.486 32.179,78.486 32.179,77.978 31.244,77.978 30.772,77.978 30.772,77.47 31.244,77.47 32.179,77.47 32.179,76.962 31.244,76.962 30.772,76.962 30.772,76.454 31.244,76.454 31.244,76.2 31.244,75.434 31.887,74.79 ; U1.86@47.21,70.24 47.21,71.759 47.086,71.882 46.907,72.062 46.547,72.421 47.049,72.922 46.69,73.281 46.188,72.78 45.29,71.882 44.931,72.241 45.829,73.139 46.665,73.975 46.305,74.334 45.47,73.498 44.572,72.6 44.213,72.96 45.111,73.858 46.009,74.756 45.649,75.115 44.751,74.217 44.392,74.576 44.198,74.771 44.178,74.79 43.918,74.79 40.259,74.79 38.237,74.79 38.237,75.595 37.729,75.595 37.729,74.79 37.729,73.091 37.221,73.091 37.221,74.79 37.221,75.595 36.713,75.595 36.713,74.79 36.713,73.051 36.205,73.051 36.205,74.79 36.205,75.595 35.697,75.595 35.697,74.79 35.697,72.769 35.189,72.769 35.189,74.79 35.189,75.595 34.681,75.595 34.681,74.79 34.681,72.769 34.173,72.769 34.173,74.79 34.173,75.61 33.665,75.61 33.665,74.79 33.665,72.769 33.157,72.769 33.157,74.79 33.157,75.9 32.649,75.9 32.649,74.79 32.649,74.62 32.141,74.62 32.141,74.79 31.887,74.79
MEM_D2: U1.114 U2.5 | length 92.3
  Top Layer w0.254: U1.114@34.41,65.94 34.401,65.931 33.334,65.931 32.843,65.44 30.856,65.44 30.228,66.069 30.228,68.072 30.228,68.326 29.409,68.326 29.409,68.834 30.228,68.834 31.851,68.834 31.851,69.342 30.228,69.342 29.409,69.342 29.409,69.85 30.228,69.85 31.851,69.85 31.851,70.358 30.228,70.358 29.409,70.358 29.409,70.866 30.228,70.866 31.822,70.866 31.822,71.374 30.228,71.374 30.228,71.882 30.228,71.974 29.939,72.263 29.939,72.517 29.939,73.025 29.409,73.025 29.409,73.533 29.939,73.533 31.295,73.533 31.295,74.041 29.939,74.041 29.409,74.041 29.409,74.549 29.939,74.549 30.977,74.549 30.977,75.057 29.939,75.057 29.409,75.057 29.409,75.565 29.939,75.565 30.524,75.565 30.524,76.073 29.939,76.073 29.409,76.073 29.409,76.581 29.939,76.581 30.317,76.581 30.317,77.089 29.939,77.089 29.409,77.089 29.409,77.597 29.939,77.597 30.317,77.597 30.317,78.105 29.939,78.105 29.409,78.105 29.409,78.613 29.939,78.613 30.317,78.613 30.317,79.121 29.939,79.121 29.409,79.121 29.409,79.629 29.939,79.629 30.317,79.629 30.317,80.137 29.939,80.137 29.409,80.137 29.409,80.645 29.939,80.645 30.317,80.645 30.317,81.153 29.939,81.153 29.409,81.153 29.409,81.661 29.939,81.661 30.829,81.661 30.829,82.169 29.939,82.169 29.409,82.169 29.409,82.677 29.939,82.677 31.295,82.677 31.295,83.185 29.939,83.185 29.409,83.185 29.409,83.693 29.939,83.693 31.295,83.693 31.295,84.201 29.939,84.201 29.409,84.201 29.409,84.709 29.939,84.709 31.295,84.709 31.295,85.217 29.939,85.217 29.409,85.217 29.409,85.725 29.939,85.725 31.295,85.725 31.295,86.233 29.939,86.233 29.409,86.233 29.409,86.741 29.939,86.741 29.939,87.249 29.939,87.63 31.447,87.63 31.849,87.228 31.849,86.389 32.133,86.106 32.251,85.987 32.341,86.077 32.7,85.718 32.61,85.628 32.224,85.242 32.583,84.882 32.97,85.269 33.149,85.089 33.403,84.836 34.292,84.836 38.141,80.987 U2.5@38.141,79.594
MEM_D3: U1.115 U2.7 | length 93.6
  Top Layer w0.254: U1.115@34.41,65.44 34.401,65.431 33.476,65.431 32.942,64.897 28.985,64.897 28.704,65.179 ; U2.7@39.741,79.594 39.741,80.532 39.563,80.71 37.976,82.297 37.834,82.155 37.475,82.514 37.617,82.656 37.796,82.835 37.437,83.194 37.258,83.015 37.116,82.873 36.756,83.232 36.899,83.374 37.078,83.553 36.718,83.913 36.539,83.734 36.397,83.592 36.038,83.951 36.18,84.093 36.359,84.272 36,84.631 35.821,84.452 35.679,84.31 35.32,84.669 35.462,84.811 35.641,84.99 35.282,85.35 35.102,85.17 34.858,84.926 34.498,85.285 34.743,85.53 34.922,85.709 34.563,86.068 34.384,85.889 34.039,85.544 33.679,85.903 34.025,86.248 34.204,86.427 33.845,86.786 33.666,86.607 33.32,86.262 32.961,86.621 33.306,86.967 33.485,87.146 33.126,87.505 32.947,87.326 32.768,87.505 32.342,87.931 32.342,88.773 32.088,89.027 28.704,89.027 28.704,88.392 28.704,88.138 28.704,87.63 29.119,87.63 29.119,87.122 28.704,87.122 27.464,87.122 27.464,86.614 28.704,86.614 28.911,86.614 28.911,86.106 28.704,86.106 27.464,86.106 27.464,85.598 28.704,85.598 28.911,85.598 28.911,85.09 28.704,85.09 27.464,85.09 27.464,84.582 28.704,84.582 28.911,84.582 28.911,84.074 28.704,84.074 27.464,84.074 27.464,83.566 28.704,83.566 28.911,83.566 28.911,83.058 28.704,83.058 27.464,83.058 27.464,82.55 28.704,82.55 28.911,82.55 28.911,82.042 28.704,82.042 27.464,82.042 27.464,81.534 28.704,81.534 28.911,81.534 28.911,81.026 28.704,81.026 27.464,81.026 27.464,80.518 28.704,80.518 28.911,80.518 28.911,80.01 28.704,80.01 27.464,80.01 27.464,79.502 28.704,79.502 28.911,79.502 28.911,78.994 28.704,78.994 27.464,78.994 27.464,78.486 28.704,78.486 28.911,78.486 28.911,77.978 28.704,77.978 27.464,77.978 27.464,77.47 28.704,77.47 28.911,77.47 28.911,76.962 28.704,76.962 27.464,76.962 27.464,76.454 28.704,76.454 28.911,76.454 28.911,75.946 28.704,75.946 27.464,75.946 27.464,75.438 28.704,75.438 28.911,75.438 28.911,74.93 28.704,74.93 27.464,74.93 27.464,74.422 28.704,74.422 28.911,74.422 28.911,73.914 28.704,73.914 28.704,66.675 ; 28.704,65.179 28.704,66.675 ; 28.704,65.179 28.704,66.675
MEM_D4: U1.58 U2.8 | length 92.2
  Top Layer w0.254: U2.8@40.541,79.594 40.541,80.746 40.361,80.926 40.002,81.285 39.643,81.644 39.521,81.522 39.162,81.881 39.283,82.003 38.673,82.614 33.657,87.63 33.657,88.719 33.002,89.374 33.002,93.311 34.594,94.903 64.465,94.903 65.915,93.453 65.915,65.169 63.807,63.061 61.21,63.061 60.669,62.52 60.669,61.884 59.945,61.161 57.865,61.161 57.559,61.467 57.052,61.467 57.025,61.44 U1.58@55.51,61.44
MEM_D5: U1.59 U2.10 | length 92.3
  Top Layer w0.254: U2.10@42.141,79.594 42.141,80.106 41.726,80.521 41.511,80.521 34.165,87.868 34.165,89.027 33.456,89.736 33.456,93.123 34.782,94.449 40.007,94.449 40.515,94.449 40.515,93.932 41.023,93.932 41.023,94.449 41.531,94.449 41.531,93.932 42.039,93.932 42.039,94.449 42.293,94.449 64.277,94.449 65.407,93.319 65.407,65.652 64.864,65.109 64.864,64.76 63.619,63.515 61.022,63.515 60.215,62.708 60.215,62.073 59.757,61.615 58.61,61.615 58.262,61.963 56.295,61.963 56.272,61.94 U1.59@55.51,61.94
MEM_D6: U1.60 U2.11 | length 92.2
  Top Layer w0.254: U2.11@42.941,79.594 42.941,79.734 42.718,79.957 42.718,80.329 42.526,80.521 42.368,80.521 41.914,80.975 41.699,80.975 34.673,88.002 34.673,89.281 33.91,90.044 33.91,92.935 34.97,93.995 39.574,93.995 40.311,93.258 42.416,93.258 43.153,93.995 45.751,93.995 46.254,93.491 46.607,93.491 47.115,93.491 47.115,93.201 47.623,93.201 47.623,93.491 47.623,93.995 48.131,93.995 48.131,93.491 48.131,93.194 48.639,93.194 48.639,93.491 48.893,93.491 49.405,93.491 49.405,93.929 49.913,93.929 49.913,93.491 50.421,93.491 50.675,93.491 51.125,93.491 51.629,93.995 64.089,93.995 64.899,93.185 64.899,65.899 64.41,65.41 64.41,64.948 63.431,63.969 60.834,63.969 59.761,62.896 59.761,62.261 59.569,62.069 58.798,62.069 58.427,62.44 U1.60@55.51,62.44
MEM_D7: U1.63 U2.13 | length 92.4
  Top Layer w0.254: U2.13@44.541,79.594 44.318,79.594 44.318,80.329 44.126,80.521 43.355,80.521 43.341,80.506 42.872,80.975 42.556,80.975 42.102,81.429 41.887,81.429 35.181,88.136 35.181,89.561 34.575,90.167 34.555,90.167 34.364,90.359 34.364,92.394 35.51,93.541 39.386,93.541 40.123,92.804 41.804,92.804 42.317,92.291 43.017,92.291 43.207,92.482 43.207,93.408 43.341,93.541 45.562,93.541 46.357,92.747 48.053,92.747 48.542,92.258 48.643,92.258 48.77,92.258 49.278,92.258 49.278,92.999 49.786,92.999 49.786,92.258 49.786,92.059 50.294,92.059 50.294,92.258 50.294,92.999 50.802,92.999 50.802,92.258 51.31,92.258 51.564,92.258 51.741,92.258 51.741,93.464 51.817,93.541 63.9,93.541 64.391,93.051 64.391,66.033 63.956,65.598 63.956,65.136 63.243,64.423 58.798,64.423 58.315,63.94 U1.63@55.51,63.94
MEM_D8: U1.64 U2.42 | length 92.2
  Top Layer w0.254: U2.42@44.541,91.094 44.541,90.158 47.754,90.158 ; 47.754,90.157 47.754,89.523 48.315,89.523 48.322,89.516 55.625,89.516 56.249,90.139 56.249,90.29 56.318,90.359 56.318,92.291 56.026,92.583 52.216,92.583 52.216,93.051 56.517,93.051 56.771,93.051 57.279,93.051 57.279,92.738 57.787,92.738 57.787,93.051 58.295,93.051 58.295,92.738 58.803,92.738 58.803,93.051 59.311,93.051 59.311,92.738 59.819,92.738 59.819,93.051 60.327,93.051 60.327,92.738 60.835,92.738 60.835,93.051 61.343,93.051 61.851,93.051 61.891,93.051 62.549,92.392 62.858,92.084 63.577,92.804 63.937,92.445 63.217,91.725 63.576,91.366 63.756,91.186 63.756,89.789 63.756,89.535 63.936,89.535 63.936,89.027 63.756,89.027 63.013,89.027 63.013,88.519 63.756,88.519 63.936,88.519 63.936,88.011 63.756,88.011 63.321,88.011 63.321,87.503 63.756,87.503 63.936,87.503 63.936,86.995 63.756,86.995 63.502,86.995 63.502,86.487 63.756,86.487 63.936,86.487 63.936,85.979 63.756,85.979 63.502,85.979 63.502,85.471 63.756,85.471 63.936,85.471 63.936,84.963 63.756,84.963 63.321,84.963 63.321,84.455 63.756,84.455 63.936,84.455 63.936,83.947 63.756,83.947 63.321,83.947 63.321,83.439 63.756,83.439 63.936,83.439 63.936,82.931 63.756,82.931 63.502,82.931 63.502,82.423 63.756,82.423 63.936,82.423 63.936,81.915 63.756,81.915 63.502,81.915 63.502,81.407 63.756,81.407 63.936,81.407 63.936,80.899 63.756,80.899 63.502,80.899 63.502,80.391 63.756,80.391 63.936,80.391 63.936,79.883 63.756,79.883 63.502,79.883 63.502,79.375 63.756,79.375 63.936,79.375 63.936,78.867 63.756,78.867 63.502,78.867 63.502,78.359 63.756,78.359 63.936,78.359 63.936,77.851 63.756,77.851 63.502,77.851 63.502,77.343 63.756,77.343 63.936,77.343 63.936,76.835 63.756,76.835 63.502,76.835 63.502,76.327 63.756,76.327 63.936,76.327 63.936,75.819 63.756,75.819 63.502,75.819 63.502,75.311 63.756,75.311 63.936,75.311 63.936,74.803 63.756,74.803 63.502,74.803 63.502,74.295 63.756,74.295 63.936,74.295 63.936,73.787 63.756,73.787 63.502,73.787 63.502,73.279 63.756,73.279 63.936,73.279 63.936,72.771 63.756,72.771 63.502,72.771 63.502,72.263 63.756,72.263 63.936,72.263 63.936,71.755 63.756,71.755 63.502,71.755 63.502,71.247 63.756,71.247 63.936,71.247 63.936,70.739 63.756,70.739 63.502,70.739 63.502,70.231 63.756,70.231 63.936,70.231 63.936,69.723 63.756,69.723 63.502,69.723 63.502,69.215 63.756,69.215 63.936,69.215 63.936,68.707 63.756,68.707 63.502,68.707 63.502,68.199 63.756,68.199 63.936,68.199 63.936,67.691 63.756,67.691 63.756,66.159 63.502,65.905 63.502,65.324 63.055,64.877 58.61,64.877 58.173,64.44 U1.64@55.51,64.44